# Altium PCB Button-Sensor.PcbDoc
Units mm, origin at the board's own origin, x right, y up, seen from the top; angles counter-clockwise.
Board outline 17.1 x 18.09 mm, 2 copper layers (Component Side, Bottom Layer), stack 1.569 mm thick; 5 components, 4 nets, 18 pads, 0 vias.
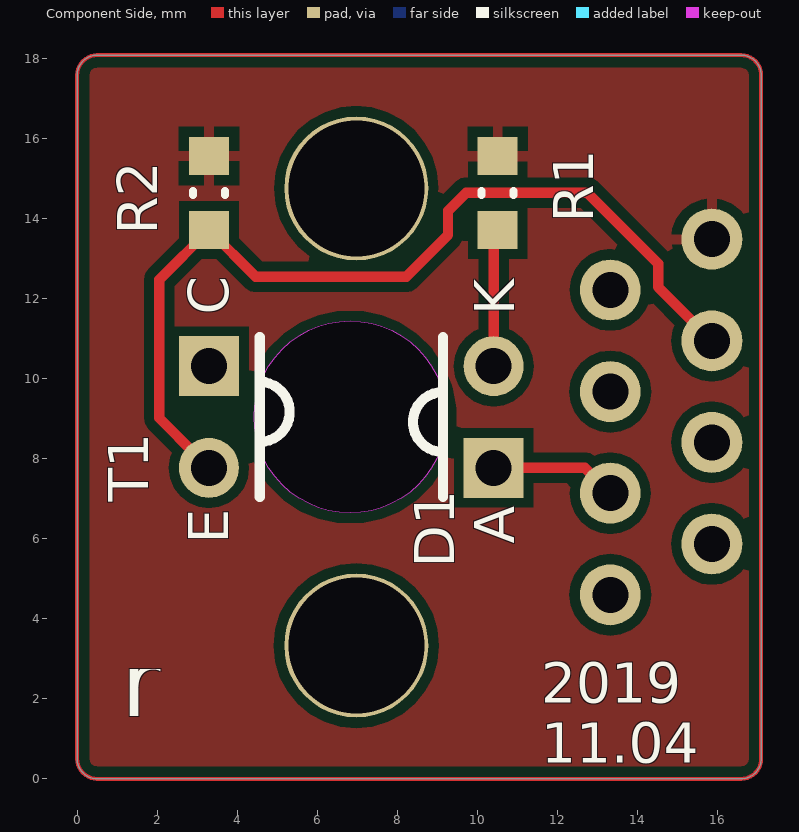
[diagram p0: Component Side view]
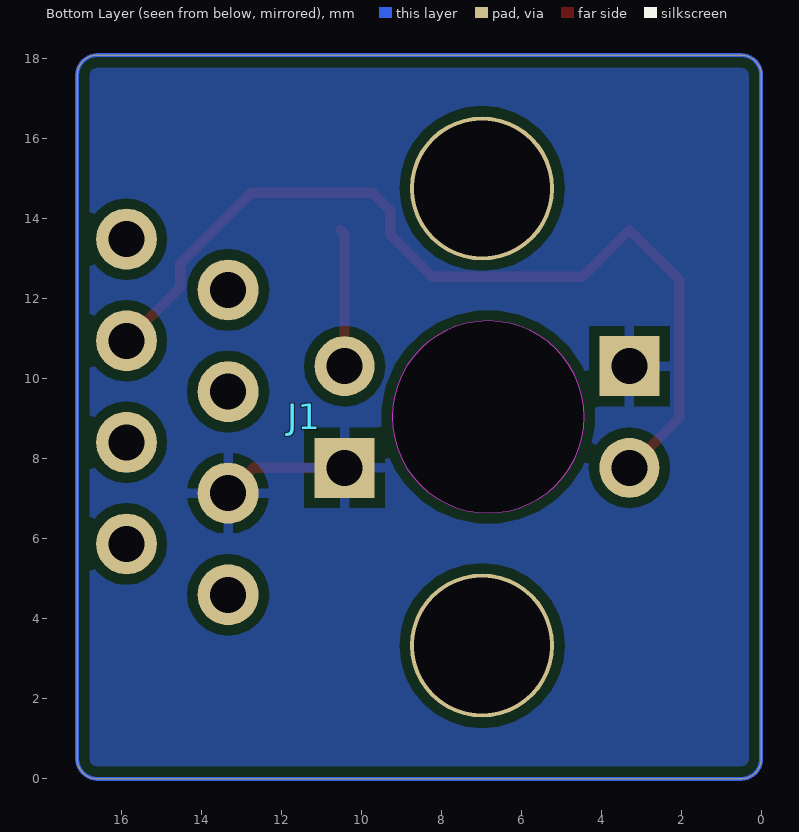
[diagram p1: Bottom Layer view, seen from below]

## Layer stack, top to bottom
Top Solder: solder mask 0.01, Solder Resist, Dk 3.5
Component Side: signal copper 0.035
Dielectric 1: core 1.499, FR-4, Dk 4.2
Bottom Layer: signal copper 0.035
Solder Side: solder mask 0.01, Solder Resist, Dk 3.5

## Board outline
0,0.5 0,17.59 cw(c0.5,17.59) 0.5,18.09 16.6,18.09 cw(c16.6,17.59) 17.1,17.59 17.1,0.5 cw(c16.6,0.5) 16.6,0 0.5,0 cw(c0.5,0.5)
cut-out: 6.825,6.645 cw(c6.825,9.045) 4.425,9.045 cw(c6.825,9.045) 6.825,11.445 cw(c6.825,9.045) 9.225,9.045 cw(c6.825,9.045)

## Design rules (kind name [scope] priority, off if disabled: settings)
Clearance [All] p1: gap=0.254 ignorepadtopadclearanceinfootprint=FALSE except(0: Arc-Hole Track-Hole SMDPad-Hole THPad-Hole Via-Hole Fill-Hole Poly-Hole Region-Hole Text-Hole)
PolygonConnect [All] p1: connectstyle=Relief reliefconductorwidth=0.254 reliefentries=4 polygonreliefangle="90 Angle" airgapwidth=0.254
RoutingVias [All] p1: holewidth=0.711 width=1.27 viastyle="Through Hole" minholewidth=0.711 minwidth=1.27 maxholewidth=0.711 maxwidth=1.27
SolderMaskExpansion [All] p1: expansion=0.102
Width [All] p1: maxlimit=0.254 minlimit=0.254 preferedwidth=0.254
30 further rules are at their usual default settings.

## Components (designator, comment, footprint, x,y, rotation, side; value= is the part's Value field where it differs from the comment)
D1 "1.6V" LTE302 10.414,9.045 r90 top
J1 "RJ45-8P8C-S" RJ45-8P8C 13.327,4.6 r90 bottom locked
R1 "850R" RESC1608X06M 10.514,14.645 r270 top
R2 "10K" RESC1608X06M 3.294,14.645 r270 top
T1 "LTR301" LTR301 3.294,9.045 r270 top

## Footprints (in the part's own frame and the unit in brackets; to place one, negate y for a bottom-side part, rotate by r counter-clockwise, add the part's x,y. Pads: shape width x height; smd on the part's side, far side on the other; paste and mask are expansions set on the pad)
LTE302 [mm]
  rect 1.5x1.5 hole 0.9: 1(-1.27,0)
  round 1.5 hole 0.9: 2(1.27,0)
  silkscreen extent -2,1.27 2,2.02
LTR301 [mm]
  rect 1.5x1.5 hole 0.9: 1(-1.27,0)
  round 1.5 hole 0.9: 2(1.27,0)
  silkscreen extent -2,1.27 2,2.02
RESC1608X06M [mm] "Chip Resistor, 2-Leads, Body 1,60x0,80mm, IPC Low Density"
  rect 0.95x1 smd: 1(-0.925,0) 2(0.925,0)
  silkscreen extent -0.05,-0.4 0.05,0.4, body extent -0.85,-0.45 0.85,0.45, height 0.6
RJ45-8P8C [mil]
  round 141.73 hole 133.86: 0(-50,-250) 0(400,-250)
  round 60 hole 35.43: 1(0,0) 2(50,100) 3(100,0) 4(150,100) 5(200,0) 6(250,100) 7(300,0) 8(350,100)
  body extent -136,-665 484,145, height 638

## Part data
D1: library part LTE-302, "IR LED 940nm", Mouser no.=859-LTE-302, V forward=1.6V
R1: library part "Resistor 850"
R2: library part "Resistor 10K"
T1: "Phototransistor 940nm", Mouser no.=859-LTR-301
J1: Datasheet=/Robotics%20Platform/Datasheets/Connectors/5721-8P8C-????.pdf

## Nets (pads, with @x,y where several pads share a name; then routed paths per layer and width w, separated by ;. In a path a pad name is that pad's centre, name@x,y a point inside that pad or via, vN(x,y) a via of type N, cw(c..) or ccw(c..) an arc to the next point about the centre after c; other vN are vias at no path point)
+3V3: D1.1 J1.3 T1.1 | length 3.2
  Component Side w0.254: D1.1 12.692,7.775 J1.3
GND: J1.8 R1.1 R2.1
NetD1_2: D1.2 R1.2 | length 3.5
  Component Side w0.254: D1.2@10.414,10.215 10.414,13.62 R1.2
OUT: J1.6 R2.2 T1.2 | length 22.7
  Component Side w0.254: T1.2@2.99,8.079 2.05,9.019 2.05,12.476 R2.2 4.464,12.55 8.225,12.55 9.274,13.599 9.274,14.199 9.725,14.65 12.75,14.65 14.525,12.875 14.525,12.292 J1.6
pads on no net: J1.0 J1.1 J1.2 J1.4 J1.5 J1.7

## Polygon pours and split planes (outlines as drawn)
+3V3 on Bottom Layer "Bottom Layer-+3V3" (solid, pour order 0): -0.013,18.045 17.214,18.045 17.214,0.045 -0.013,0.045
GND on Component Side "Component Side-GND" (solid, pour order 2): -0.013,18.045 17.214,18.045 17.214,0.045 -0.013,0.045

## Other copper
Multi-Layer:
  the board outline again, w0.1

## Silkscreen, mask and mechanical layers (free items; w line width, h text height)
Top Overlay:
  text "r" at 1.1,1 h3
  text "2019 / 11.04" at 11.6,0.4 h1
Mechanical 13:
  circle w0.254: c6.825,9.045 r2.4
Mechanical 15:
  drawing of 191 lines, arcs and shapes, not listed
  text "Layer" at 27.605,19.302 h1.52
  text "Name" at 38.016,19.302 h1.52
  text "Material" at 61.886,19.302 h1.52
  text "Thickness" at 83.724,19.302 h1.52
  text "Constant" at 100.23,19.302 h1.52
  text "Board Layer Stack" at 114.704,19.302 h1.52
  text "1" at 27.605,16.254 h1.52
  text "Top Overlay" at 38.016,16.254 h1.52
  text "2" at 27.605,13.206 h1.52
  text "Top Solder" at 38.016,13.206 h1.52
  text "Solder Resist" at 61.886,13.206 h1.52
  text "0,010mm" at 83.724,13.206 h1.52
  text "3,5" at 100.23,13.206 h1.52
  text "3" at 27.605,10.158 h1.52
  text "Component Side" at 38.016,10.158 h1.52
  text "Copper" at 61.886,10.158 h1.52
  text "0,035mm" at 83.724,10.158 h1.52
  text "4" at 27.605,7.11 h1.52
  text "Dielectric 1" at 38.016,7.11 h1.52
  text "FR-4" at 61.886,7.11 h1.52
  text "1,499mm" at 83.724,7.11 h1.52
  text "4,2" at 100.23,7.11 h1.52
  text "5" at 27.605,4.062 h1.52
  text "Bottom Layer" at 38.016,4.062 h1.52
  text "Copper" at 61.886,4.062 h1.52
  text "0,035mm" at 83.724,4.062 h1.52
  text "6" at 27.605,1.014 h1.52
  text "Solder Side" at 38.016,1.014 h1.52
  text "Solder Resist" at 61.886,1.014 h1.52
  text "0,010mm" at 83.724,1.014 h1.52
  text "3,5" at 100.23,1.014 h1.52
  text "7" at 27.605,-2.034 h1.52
  text "Bottom Overlay" at 38.016,-2.034 h1.52

## Dimensions
0.5,18.09 to 0.5,0 on Mechanical 15
0,17.59 to 17.1,17.59 on Mechanical 15

## Text inside footprints (layer, text, board x,y; h text height)
D1: Top Overlay "K" at 10.922,11.585 h1 r90; Top Overlay "A" at 10.922,5.87 h1 r90
T1: Top Overlay "E" at 3.775,5.875 h1 r90; Top Overlay "C" at 3.775,11.6 h1 r90